# Altium PCB SlowDanceTop.PcbDoc
Units mm, origin at the board's own origin, x right, y up, seen from the top; angles counter-clockwise.
Board outline 56.05 x 45.55 mm, 2 copper layers (Top Layer, Bottom Layer); 63 components, 47 nets, 223 pads, 72 vias.
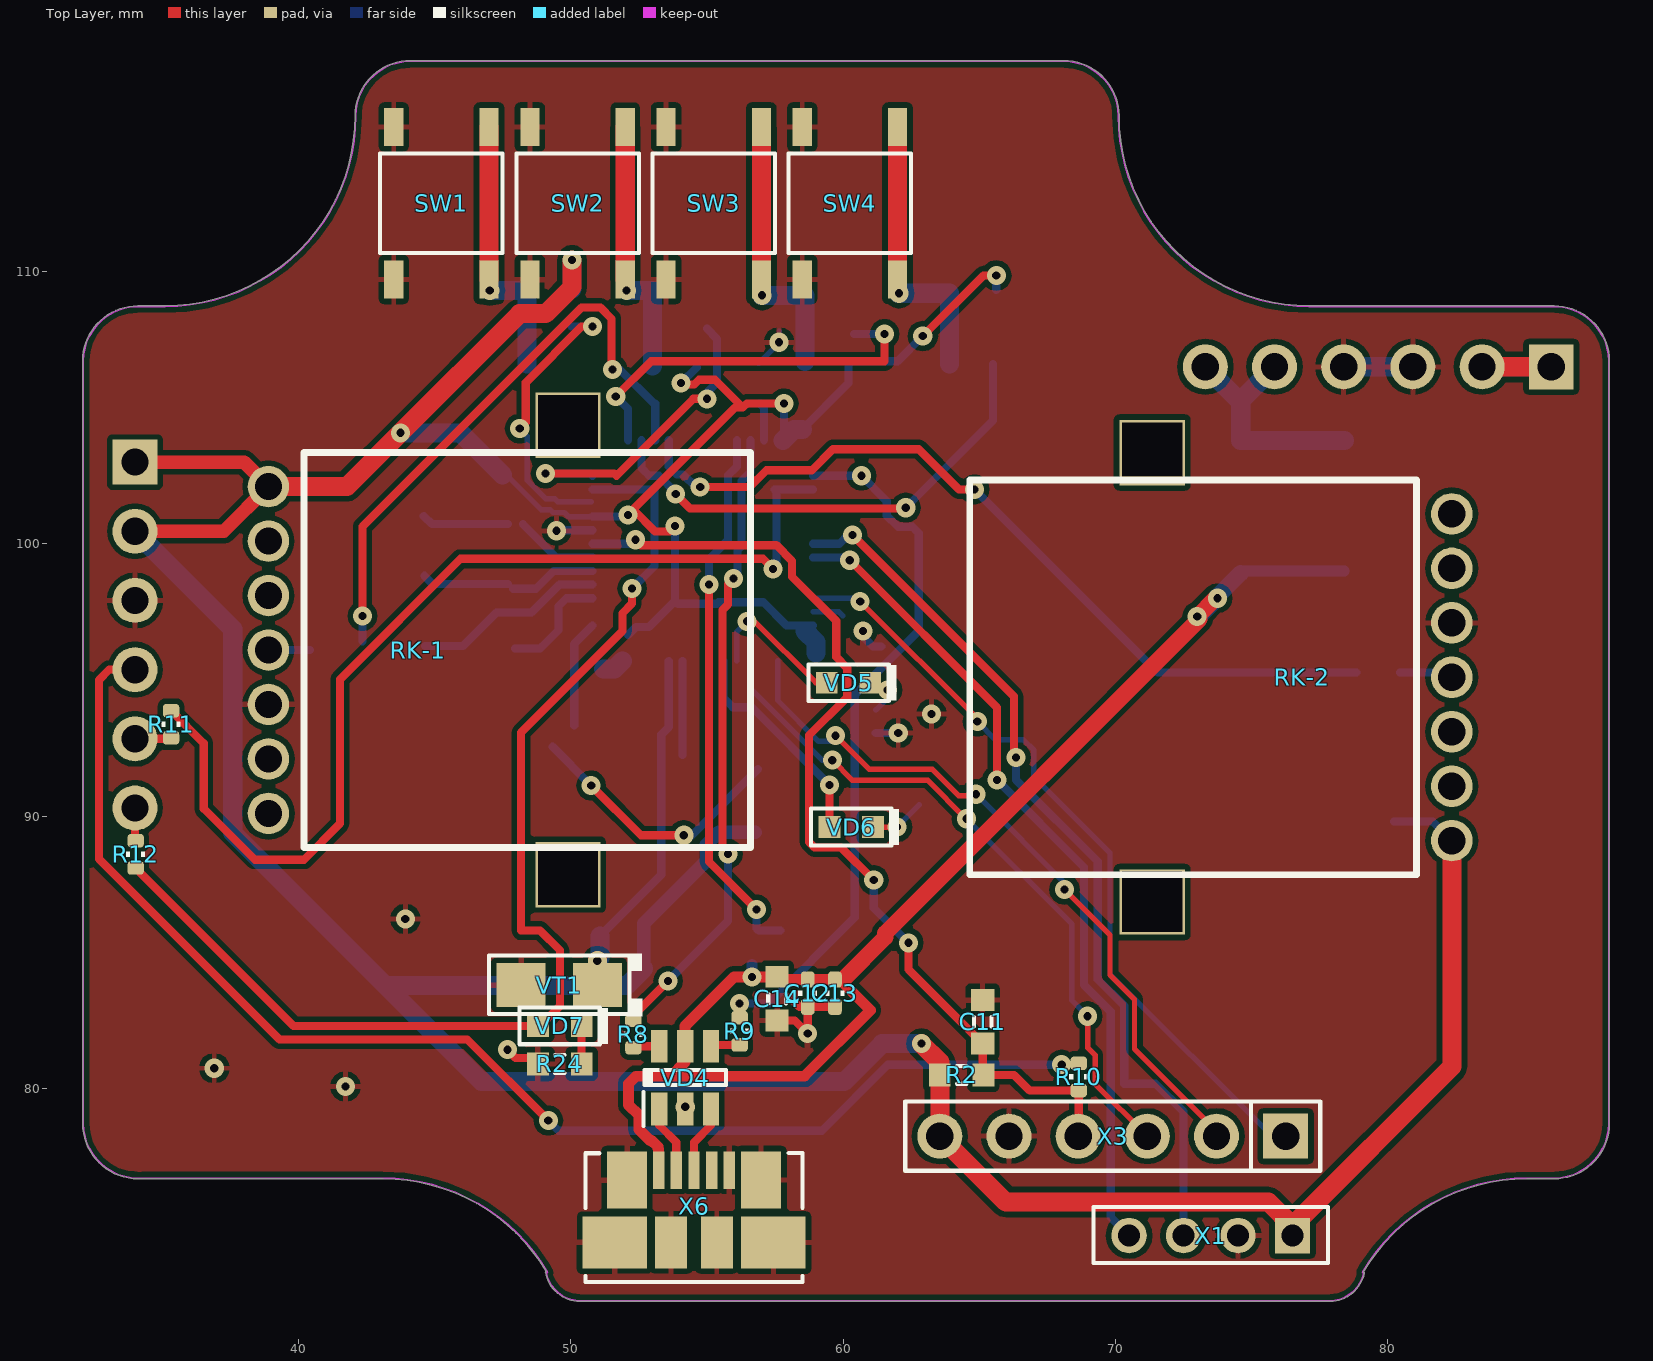
[diagram p0: Top Layer view]
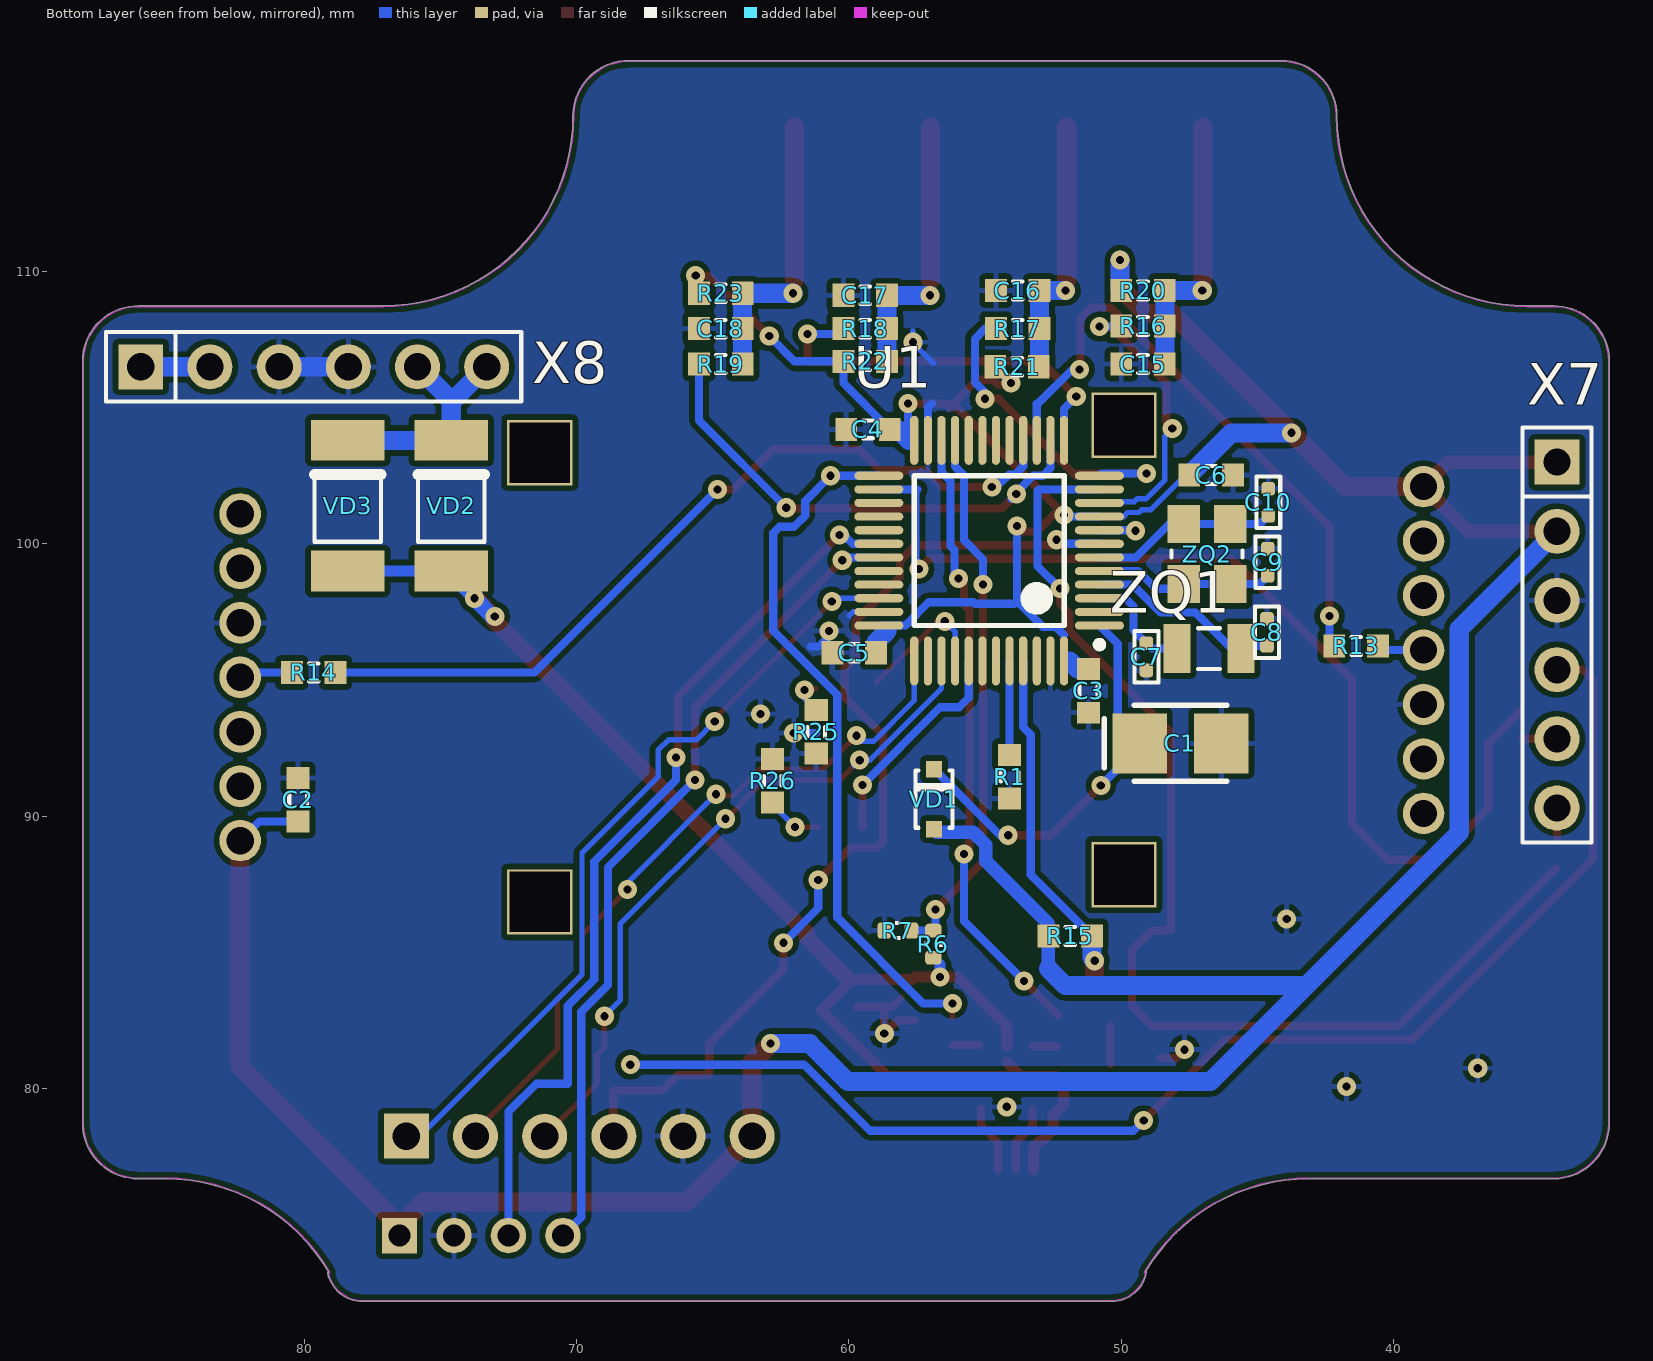
[diagram p1: Bottom Layer view, seen from below]
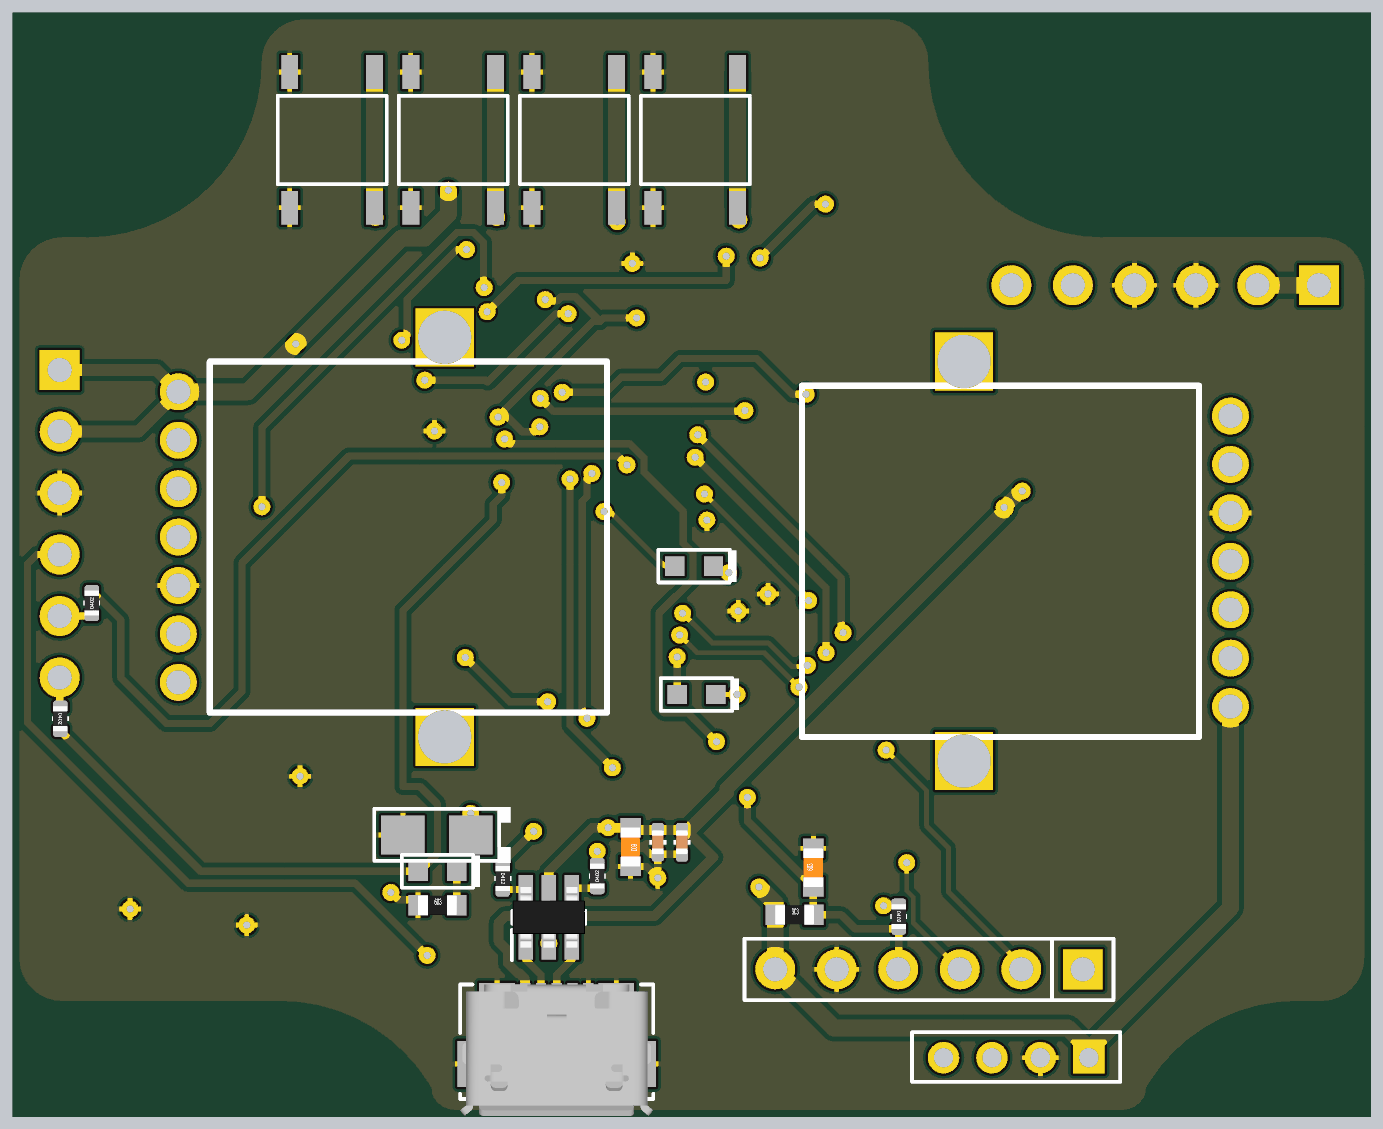
[diagram p2: 3D render of the assembled board from above, using the file's embedded part models]
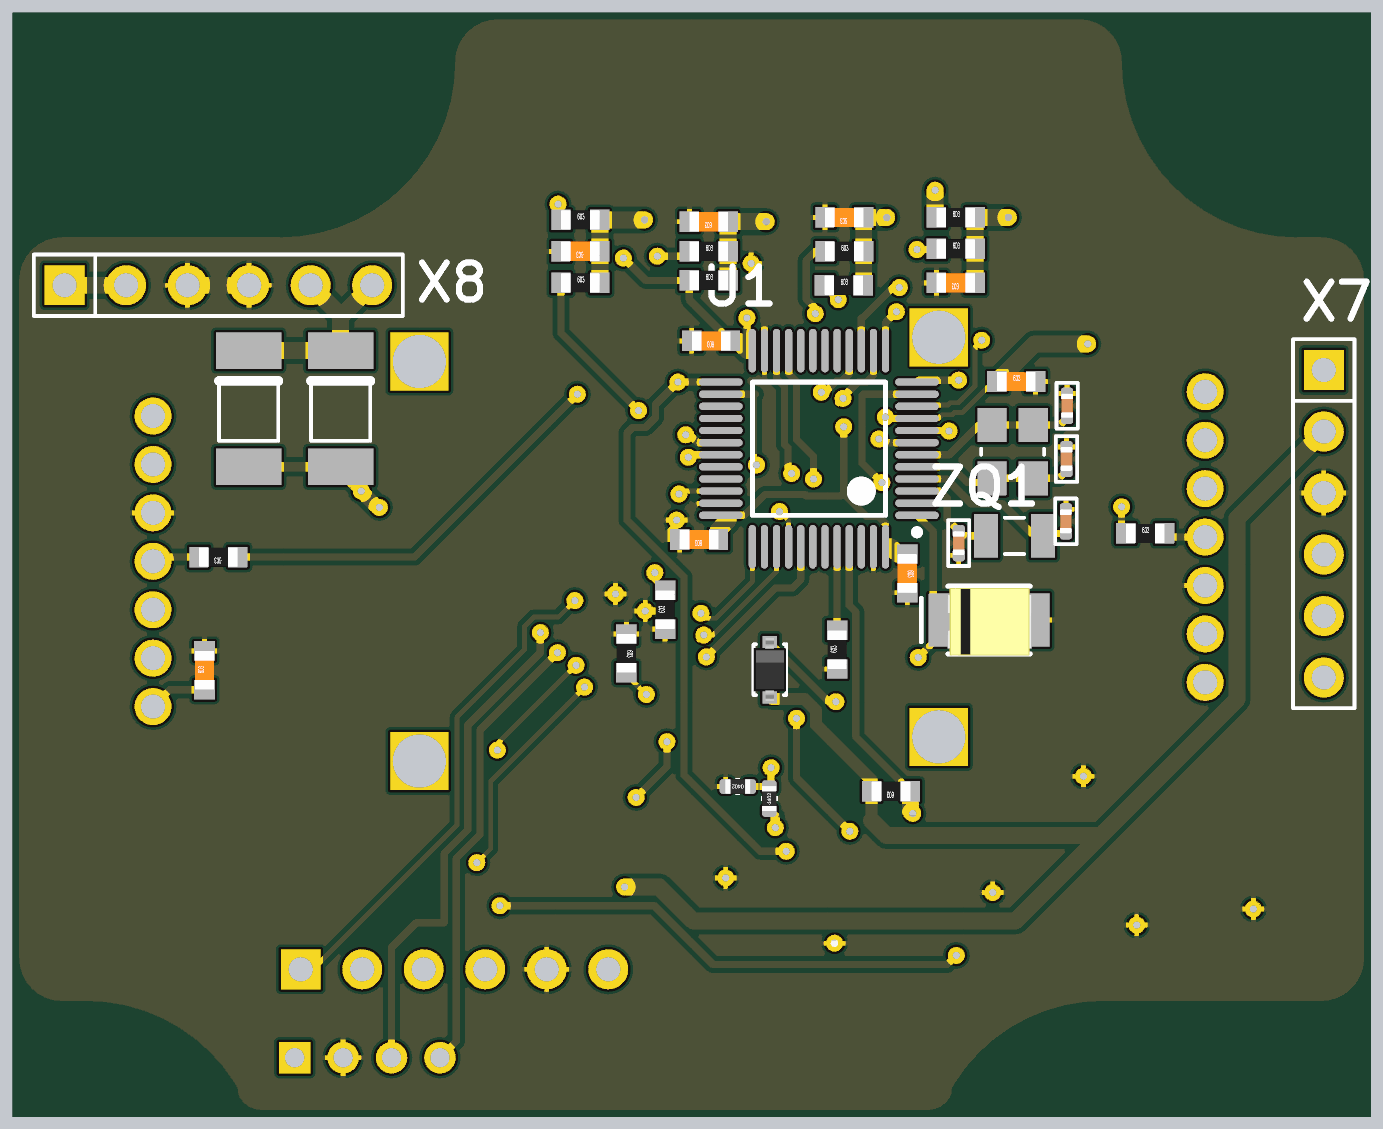
[diagram p3: 3D render of the assembled board from below, using the file's embedded part models]

## Layer stack, top to bottom
Top Solder: solder mask 0.0102, Solder Resist, Dk 3.5
Top Layer: signal copper 0.0356
Dielectric 1: dielectric 0.32, FR-4, Dk 4.8
Bottom Layer: signal copper 0.0356
Bottom Solder: solder mask 0.0102, Solder Resist, Dk 3.5

## Board outline
49.073,73.251 cw(c49.098,73.255) 49.099,73.28 ccw(c43.106,69.712) 43.106,76.687 34.106,76.687 cw(c34.106,76.712) 34.106,76.687 ccw(c34.106,78.712) 34.106,76.687 cw(c34.106,78.712) 32.081,78.712 32.081,106.712 cw(c34.106,106.712) 34.106,108.737 35.106,108.737 ccw(c35.106,115.712) 42.081,115.712 cw(c44.106,115.712) 44.106,117.737 68.106,117.737 cw(c68.106,115.712) 70.131,115.712 ccw(c77.106,115.712) 77.106,108.737 cw(c77.106,108.712) 77.106,108.737 86.106,108.737 cw(c86.106,106.712) 88.131,106.712 88.131,78.712 cw(c86.106,78.712) 86.106,76.687 85.106,76.687 ccw(c85.106,69.712) 79.099,73.256 cw(c79.11,73.233) 79.136,73.233 cw(c79.11,73.233) 79.135,73.228 cw(c77.872,73.474) 77.877,72.187 cw(c77.872,72.212) 77.872,72.187 50.34,72.187 cw(c50.34,72.212) 50.338,72.187 cw(c50.34,73.474)

## Design rules (kind name [scope] priority, off if disabled: settings)
Clearance [All] p1: gap=0.2 ignorepadtopadclearanceinfootprint=FALSE except(0: Arc-Hole Track-Hole SMDPad-Hole THPad-Hole Via-Hole Fill-Hole Poly-Hole Region-Hole Text-Hole)
DiffPairsRouting [All] p1: maxlimit=0.254 minlimit=0.1 mostfreqgap=0.2 toplayer_minwidth=0.1 toplayer_maxwidth=0.381 toplayer_prefwidth=0.3 bottomlayer_minwidth=0.1 bottomlayer_maxwidth=0.381 bottomlayer_prefwidth=0.3 maxuncoupledlength=12.7
MatchedLengths [InxSignalClass('All xSignals')] p1: tolerance=1 checknetsindiffpair=TRUE checkdiffpairvsdiffpair=FALSE checkxsignals=FALSE checkothers=FALSE
PlaneClearance [All] p1: clearance=0.5
PlaneConnect [All] p1: planeconnectstyle=Relief reliefexpansion=0.5 reliefentries=4 reliefconductorwidth=0.2 reliefairgap=0.2
PolygonConnect [All] p1: connectstyle=Relief reliefconductorwidth=0.2 reliefentries=4 polygonreliefangle="90 Angle" airgapwidth=0.2
RoutingVias [All] p1: holewidth=0.3 width=0.7 viastyle="Through Hole" minholewidth=0.3 minwidth=0.7 maxholewidth=0.3 maxwidth=0.7
SolderMaskExpansion [All] p1: expansion=0.102
Width 3V3 [All] p1: maxlimit=0.7 minlimit=0.2 preferedwidth=0.3
Width 5V [InNet('5V')] p2: maxlimit=2 minlimit=0.2 preferedwidth=0.6
Width [All] p3: maxlimit=1 minlimit=0.2 preferedwidth=0.3
27 further rules are at their usual default settings.

## Components (designator, comment, footprint, x,y, rotation, side; value= is the part's Value field where it differs from the comment)
C1 "Tann B 100 мкФ 6 В" CAP_POL_SIZE_B 47.825,92.675 r180 bottom value="100 мкФ"
C2 "C0603-X7R-50В-0.1мкФ" C0603_HD 80.225,90.6 r90 bottom value="0.1 мкФ"
C3 "C0603-X7R-50В-0.1мкФ" C0603_HD 51.2,94.6 r270 bottom value="0.1 мкФ"
C4 "C0603-X7R-50В-0.1мкФ" C0603_HD 59.3,104.2 r0 bottom value="0.1 мкФ"
C5 "C0603-X7R-50В-0.1мкФ" C0603_HD 59.8,96 r0 bottom value="0.1 мкФ"
C6 "C0603-X7R-50В-0.1мкФ" C0603_HD 46.7,102.525 r180 bottom value="0.1 мкФ"
C7 "C0402-X7R-16В-20pF-10%" C0402_HD 49.075,95.85 r90 bottom value=20пФ
C8 "C0402-X7R-16В-20pF-10%" C0402_HD 44.65,96.75 r270 bottom value=20пФ
C9 "C0402-X7R-16В-20pF-10%" C0402_HD 44.625,99.325 r270 bottom value=20пФ
C10 "C0402-X7R-16В-20pF-10%" C0402_HD 44.6,101.525 r270 bottom value=20пФ
C11 "C0603-X5R-16В-22нФ" C0603_HD 65.125,82.45 r90 top value=22нФ
C12 "C0402-X7R-10В-47нФ" C0402_min 58.7,83.5 r270 top value="47 нФ"
C13 "C0402-X7R-16В-0.1мкФ" C0402_min 59.7,83.5 r90 top value="0.1 мкФ"
C14 "C0603-X5R-6.3В-4.7мкФ±20%" C0603_HD 57.575,83.3 r270 top value="4.7 мкФ"
C15 "C0603-X5R-16В-22нФ" C0603_HD 49.2,106.6 r0 bottom value=22нФ
C16 "C0603-X5R-16В-22нФ" C0603_HD 53.8,109.3 r0 bottom value=22нФ
C17 "C0603-X5R-16В-22нФ" C0603_HD 59.4,109.125 r0 bottom value=22нФ
C18 "C0603-X5R-16В-22нФ" C0603_HD 64.7,107.9 r0 bottom value=22нФ
R1 "R0603-10кОм-5%" R0603_HD 54.1,91.45 r90 bottom value="10 кОм"
R2 "R0603-100кОм-5%" R0603_HD 64.35,80.5 r0 top value="100 кОм"
R6 "R0402-100кОм-5%" R0402_min 56.9,85.3 r90 bottom value="100 кОм"
R7 "R0402-000кОм-5%" R0402_min 58.2,85.8 r0 bottom value="200 кОм"
R8 "R0402-39Ом-5%" R0402_min 52.3,82 r270 top value="39 Ом"
R9 "R0402-39Ом-5%" R0402_min 56.2,82.1 r90 top value="39 Ом"
R10 "R0402-100Ом-5%" R0402_min 68.65,80.425 r270 top value="100 Ом"
R11 "R0402-100Ом-5%" R0402_min 35.325,93.375 r90 top value="100 Ом"
R12 "R0402-100Ом-5%" R0402_min 34.025,88.6 r270 top value="100 Ом"
R13 "R0603-1кОм-5%" R0603_HD 41.375,96.25 r180 bottom value="1 кОм"
R14 "R0603-1кОм-5%" R0603_HD 79.65,95.275 r0 bottom value="1 кОм"
R15 "R0603-100кОм-5%" R0603_HD 51.875,85.6 r0 bottom value=100кОм
R16 "R0603-1кОм-5%" R0603_HD 49.2,108 r180 bottom value="1 кОм"
R17 "R0603-1кОм-5%" R0603_HD 53.8,107.9 r180 bottom value="1 кОм"
R18 "R0603-1кОм-5%" R0603_HD 59.4,107.9 r180 bottom value="1 кОм"
R19 "R0603-1кОм-5%" R0603_HD 64.7,106.6 r180 bottom value="1 кОм"
R20 "R0603-100кОм-5%" R0603_HD 49.2,109.3 r180 bottom value=100кОм
R21 "R0603-100кОм-5%" R0603_HD 53.825,106.5 r180 bottom value=100кОм
R22 "R0603-100кОм-5%" R0603_HD 59.4,106.7 r180 bottom value=100кОм
R23 "R0603-100кОм-5%" R0603_HD 64.7,109.2 r180 bottom value=100кОм
R24 "R0603-100кОм-5%" R0603_HD 49.6,80.9 r0 top value=100кОм
R25 "R0603-100кОм-5%" R0603_HD 61.2,93.1 r90 bottom value=100кОм
R26 "R0603-100кОм-5%" R0603_HD 62.8,91.3 r270 bottom value=100кОм
RK-1 "RK-1412G-A100K" RK-1412G 38.9,96.1 r270 top
RK-2 "RK-1412G-A100K" RK-1412G 82.35,95.1 r90 top
SW1 "SWT-30" SWT-30 45.25,112.5 r270 top
SW2 "SWT-30" SWT-30 50.25,112.5 r270 top
SW3 "SWT-30" SWT-30 55.25,112.5 r270 top
SW4 "SWT-30" SWT-30 60.25,112.5 r270 top
U1 "STM32F103C6T6A" STM-LQFP48_N 54.85,99.75 r0 bottom
VD1 "BAS16HT1" "SOD323 (SC-76)" 56.875,90.625 r90 bottom
VD2 "SM4007" DO-213AB_ 74.6,101.4 r270 bottom
VD3 "SM4007" DO-213AB_ 78.4,101.4 r270 bottom
VD4 "USBLC6-2SC6" "SOT23-6L (ST)" 54.2,80.4 r0 top
VD5 "KP1608ZGC" LED_0603 60.2,94.9 r0 top
VD6 "KP1608ZGC" LED_0603 60.3,89.6 r0 top
VD7 "KP1608ZGC" LED_0603 49.6,82.3 r0 top
VT1 "KP-3216P3C" photocell_1206 50.975,83.8 r180 top
X1 "n/m PLS-4" PLS2-4 76.5,74.6 r90 top
X3 "n/m PLS-6" PLS-06 76.25,78.25 r180 top
X6 "Molex 47346-1001" "MicroUSB 047346-0001 Molex" 54.525,75.675 r90 top
X7 "n/m PLS-6" PLS-06 34,103 r270 bottom
X8 "n/m PLS-6" PLS-06 86,106.5 r180 bottom
ZQ1 "DST310S 32.768 kHz, 20ppm, 50 kOhm, 7pF (1TJF0SPDJ1AI00D)" DST310S 46.775,96.15 r180 bottom value="32.768 кГц"
ZQ2 "DSX321G 12 MHz, 10ppm@25C, 20ppm@-40+85C, 80 Ohm, 12pF (1C212000AB0AB)" DSX321G 46.85,99.625 r270 bottom value="12 МГц"

## Footprints (in the part's own frame and the unit in brackets; to place one, negate y for a bottom-side part, rotate by r counter-clockwise, add the part's x,y. Pads: shape width x height; smd on the part's side, far side on the other; paste and mask are expansions set on the pad)
C0402_HD [mm]
  rrect50% 0.5x0.5 smd: 1(0.5,0) 2(-0.5,0)
  silkscreen extent -0.94,-0.44 0.94,0.44, body extent -0.5,-0.25 0.5,0.25, height 0.48
C0402_min [mm]
  rrect50% 0.6x0.5 smd: 1(-0.5,0) 2(0.5,0)
  silkscreen extent -0.1,-0.35 0.1,0.35, body extent -0.5,-0.25 0.5,0.25, height 0.48
C0603_HD [mm]
  rect 0.8x0.85 smd: 1(-0.8,0) 2(0.8,0)
  silkscreen extent -0.18,-0.33 0.18,0.33, body extent -0.8,-0.4 0.8,0.4, height 0.3
CAP_POL_SIZE_B [mm]
  rect 2x2.2 smd: 1(-1.5,0) 2(1.5,0)
  silkscreen extent -2.8,-1.4 1.7,1.4, body extent -1.72,-1.48 1.77,1.32, height 1.91
DO-213AB_ [mm]
  rect 1.5x2.7 smd: 1(2.4,0) 2(-2.4,0)
  silkscreen extent -1.15,-1.22 1.32,1.23, body extent -2.52,-1.25 2.48,1.25, height 2.5
DST310S [mm]
  rect 1x1.8 smd: 1(-1.175,0) 2(1.175,0)
  silkscreen extent -0.4,-0.75 0.4,0.75, body extent -1.6,-0.75 1.6,0.75, height 0.85
DSX321G [mm]
  rect 1.4x1.2 smd: 1(-1.1,-0.85) 2(1.1,-0.85) 3(1.1,0.85) 4(-1.1,0.85)
  silkscreen extent -0.13,-1.3 0.13,1.3, body extent -1.6,-1.3 1.6,1.3, height 1
LED_0603 [mm]
  rect 0.8x0.8 smd: 1(-0.8,0) 2(0.8,0)
  silkscreen extent -1.47,-0.67 1.75,0.67, body extent -0.8,-0.4 0.8,0.4, height 1.1
"MicroUSB 047346-0001 Molex" [mm]
  rect 1.38x0.42 smd mask+0.1: 1(1.33,1.3) 2(1.33,0.65) 3(1.33,0) 4(1.33,-0.65) 5(1.33,-1.3)
  rect 1.9x2.375 smd mask+0.1: 6(-1.33,2.912) 6(-1.33,-2.912)
  rect 1.9x1.175 smd mask+0.1: 6(-1.329,-0.836) 6(-1.329,0.836)
  rect 2.1x1.475 smd mask+0.1: 6(0.97,2.462) 6(0.97,-2.462)
  silkscreen extent -2.78,-3.99 1.95,3.99, body extent -3.48,-3.99 1.95,3.99, height 2.67
photocell_1206 [mm]
  rect 1.8x1.6 smd: 1(2.8,0) 2(0,0)
  Top Layer pour cut-out: 0.9,1 1.9,1 1.9,-0.925 0.9,-0.925
  silkscreen extent -1.65,-1.16 3.98,1.15, body extent -0.2,-0.8 3,0.8, height 1.1
PLS2-4 [mm]
  rect 1.3x1.3 hole 0.8: 1(0,0)
  round 1.3 hole 0.8: 2(0,2) 3(0,4) 4(0,6)
  silkscreen extent -1,-1.3 1.05,7.3
PLS-06 [mm]
  rect 1.65x1.65 hole 1: 1(0,0)
  round 1.65 hole 1: 2(2.54,0) 3(5.08,0) 4(7.62,0) 5(10.16,0) 6(12.7,0)
  silkscreen extent -1.27,-1.27 13.97,1.27
R0402_min [mm]
  rrect50% 0.5x0.6 smd: 1(-0.5,0) 2(0.5,0)
  silkscreen extent -0.1,-0.35 0.1,0.35, body extent -0.52,-0.3 0.52,0.3, height 0.34
R0603_HD [mm]
  rect 0.8x0.85 smd: 1(-0.8,0) 2(0.8,0)
  silkscreen extent -0.18,-0.33 0.18,0.33, body extent -0.8,-0.4 0.8,0.4, height 0.3
RK-1412G [mm]
  round 1.524 hole 1: 1(-4,0) 1'(-6,0) 2(-2,0) 2'(0,0) 3(4,0) 3'(2,0) 4(6,0)
  rect 2.4x2.4 hole 2.2 square: ""(-8.25,11) ""(8.25,11)
  silkscreen extent -7.25,1.3 7.25,17.7
"SOD323 (SC-76)" [mm]
  rect 0.6x0.6 smd: 1(-1.1,0) 2(1.1,0)
  silkscreen extent -1.05,-0.75 1.05,0.67, body extent -1.3,-0.67 1.3,0.68, height 1.1
"SOT23-6L (ST)" [mm]
  rect 0.6x1.2 smd: 1(-0.95,-1.15) 2(0,-1.15) 3(0.95,-1.15) 4(0.95,1.15) 5(0,1.15) 6(-0.95,1.15)
  silkscreen extent -1.53,-1.78 1.5,0.28, body extent -1.5,-1.25 1.5,1.25, height 1.05
STM-LQFP48_N [mm] "QFP, 48-Leads, Body 7x7mm, Pitch 0.5mm, IPC Medium Density"
  oval 1.8x0.3 smd: 1(-4.05,2.75) 2(-4.05,2.25) 3(-4.05,1.75) 4(-4.05,1.25) 5(-4.05,0.75) 6(-4.05,0.25) 7(-4.05,-0.25) 8(-4.05,-0.75) 9(-4.05,-1.25) 10(-4.05,-1.75) 11(-4.05,-2.25) 12(-4.05,-2.75) 25(4.05,-2.75) 26(4.05,-2.25) 27(4.05,-1.75) 28(4.05,-1.25) 29(4.05,-0.75) 30(4.05,-0.25) 31(4.05,0.25) 32(4.05,0.75) 33(4.05,1.25) 34(4.05,1.75) 35(4.05,2.25) 36(4.05,2.75)
  oval 0.3x1.8 smd: 13(-2.75,-4.05) 14(-2.25,-4.05) 15(-1.75,-4.05) 16(-1.25,-4.05) 17(-0.75,-4.05) 18(-0.25,-4.05) 19(0.25,-4.05) 20(0.75,-4.05) 21(1.25,-4.05) 22(1.75,-4.05) 23(2.25,-4.05) 24(2.75,-4.05) 37(2.75,4.05) 38(2.25,4.05) 39(1.75,4.05) 40(1.25,4.05) 41(0.75,4.05) 42(0.25,4.05) 43(-0.25,4.05) 44(-0.75,4.05) 45(-1.25,4.05) 46(-1.75,4.05) 47(-2.25,4.05) 48(-2.75,4.05)
  silkscreen extent -4.17,-2.75 2.75,3.57, body extent -3.5,-3.5 3.5,3.5, height 1.6
SWT-30 [mm]
  rect 1.4x0.7 smd: 1(-2.8,-1.75) 1(2.8,-1.75) 2(-2.8,1.75) 2(2.8,1.75)
  silkscreen extent -1.83,-2.25 1.83,2.25, body extent -1.83,-2.25 1.83,2.25, height 1.5

## Part data
C1: library part CAP_TANT_B
C2 C3 C4 C5 C6 C12 C13: library part C0603
C7 C8 C9 C10: library part C0402
C11 C14 C15 C16 C17 C18: library part C0603_HD
R1 R2 R13 R14 R15 R16 R17 R18 R19 R20 R21 R22 R23 R24 R25 R26: library part R0603
R6 R7 R8 R9 R10 R11 R12: library part R0402
RK-1 RK-2: library part RK-1412G, Operation voltage (AC only)=50В, Rated power="50 мВт", Resistance="0-100 кОм", Total rot.angle=300
U1: "ARM Cortex-M3 32-bit MCU, 32 KB Flash, 10 KB Internal RAM, 37 I/Os, 48-pin LQFP, -40 to 85 degC, Tray", I/Os (High Current)=37, Operating Frequency(F) (Processor speed) (MHz)=72, Supplier Part Number 1=497-11515-ND, Supply Voltage(Vcc) min (V)=2, A/D Converter="2x12-bit (10 Channel)", ComponentLink1Description="Manufacturer URL", ComponentLink1URL=http://www.st.com/web/en/home.html, ComponentLink2Description=Datasheet, ComponentLink2URL=http://www.st.com/st-web-ui/static/active/en/resource/technical/document/datasheet/CD00210843.pdf, ComponentLink3Description="Package Specification", ComponentLink3URL=http://www.st.com/st-web-ui/static/active/en/resource/technical/document/datasheet/DM00058181.pdf, Core="ARM Cortex-M3", DatasheetVersion="Rev. 6", FLASH Size (Prog) (kB)=32, Internal RAM Size (kB)=10, Mounting Technology="Surface Mount", PackageDescription="48-Pin Low Profile Quad Flat Package, 7 x 7 mm Body, 0.5 mm Pitch", PackageReference=LQFP48, PackageVersion="Rev. 6, 06/2013", Packing=Tray, PartNumber=STM32F103C6T6A, Supplier 1=Digi-Key, Supplier 2=Farnell, Supplier 3=Newark, Supplier 4=Newark, Supplier 5=Mouser, Supplier Part Number 2=1972391, Supplier Part Number 3=72T2643, Supplier Part Number 4=57P1219, Supplier Part Number 5=511-STM32F103C6T6A
VD1: library part BAS16H
VD2 VD3: library part SM400x
VD5 VD6 VD7: library part LED_0603
X1: library part PLS2-4
X3 X7 X8: library part PLS-6
X6: library part "MicroUSB 047346-0001 Molex"
ZQ2: library part DSX321G

## Via types
v1: diameter 0.7, hole 0.3, Top Layer to Bottom Layer, 72 vias

## Nets (pads, with @x,y where several pads share a name; then routed paths per layer and width w, separated by ;. In a path a pad name is that pad's centre, name@x,y a point inside that pad or via, vN(x,y) a via of type N, cw(c..) or ccw(c..) an arc to the next point about the centre after c; other vN are vias at no path point)
3V3: C2.1 C3.1 C4.1 C5.1 C6.1 R2.1 R15.2 R20.1 R21.1 R22.1 R23.1 RK-1.1' RK-2.1' U1.9 U1.24 U1.36 U1.48 VD1.1 X1.1 X3.6 X7.1 X7.2 | length 171.2
  Top Layer w0.3: v1(52.103,101.055) 52.298,101.25 53.098,100.45 53.623,100.45 v1(53.828,100.655) ; v1@52.103,101.07 56.033,105 56.315,105 ; v1(54.053,105.905) 54.108,105.85 54.535,105.85 54.71,106.025 55.29,106.025 56.315,105 ; v1(57.825,105.15) 56.465,105.15 56.315,105 ; v1(62.925,107.625) 65.15,109.85 v1(65.625,109.85)
  Top Layer w0.5: X7.2 37.26,100.46 RK-1.1' 38,103 X7.1
  Top Layer w0.7: RK-1.1' 41.775,102.1 v1(43.75,104.075) 48.125,108.45 49.078,108.45 50.05,109.422 v1(50.05,110.425) ; v1(62.875,81.65) 63.55,80.975 R2.1 X3.6 65.975,75.825 75.625,75.825 76.5,74.95 82.35,80.8 RK-2.1'
  Bottom Layer w0.2: C6.1@47.647,102.525 48.922,101.25 49.25,101.25 49.35,101.15 49.764,101.15 49.914,101 U1.9
  Bottom Layer w0.3: U1.9 52.048,101 v1(52.103,101.055) ; 52.1,96.657 52.393,96.95 52.875,96.95 53.828,97.903 ; v1(53.828,100.655) 53.828,97.903 ; v1(54.053,105.905) R21.1@54.625,106.478 ; U1.24@57.675,103.875 57.825,104.025 v1(57.825,105.15) ; C4.1 60.2,105.9 R22.1 62,106.7 v1(62.925,107.625) ; U1.36 57.925,97 57.07,97.855 55.42,97.855 55.365,97.8 53.93,97.8 53.828,97.903 ; R23.1@65.625,109.325 v1(65.625,109.85) ; C2.1 81.65,89.8 RK-2.1'
  Bottom Layer w0.5: 52.675,84.4 R15.2 52.675,86.05 54.975,88.35 54.975,88.946 55.444,89.415 VD1.1@56.765,89.415
  Bottom Layer w0.7: X7.2 37.588,96.872 37.588,89.395 43.208,83.775 ; v1(43.75,104.075) 45.953,104.075 C6.1@47.5,102.528 ; R20.1@50.05,109.35 v1(50.05,110.425) ; C3.1 51.6,95.4 51.9,95.7 ; 52.675,84.4 52.05,83.775 43.208,83.775 ; 57.8,103.8 58.2,104.2 C4.1 ; 58.6,96.8 59,96.4 C5.1 ; v1(62.875,81.65) 61.435,81.65 60.035,80.25 46.733,80.25 43.208,83.775
5V: VD2.2 VD3.2 X8.5 X8.6 | length 8.9
  Bottom Layer w0.7: X8.6 74.6,105.2 ; X8.5 74.6,105.26 74.6,105.2 ; VD3.2 VD2.2 74.6,105.2
+12В: X8.1 X8.2 | length 5.1
  Top Layer w0.7: X8.2 X8.1
  Bottom Layer w0.7: X8.2 X8.1
GND: C1.2 C2.2 C3.2 C4.2 C5.2 C6.2 C7.2 C8.2 C9.2 C10.2 C11.2 C12.2 C13.1 C14.2 C15.2 C16.2 C17.2 C18.2 R1.1 R7.2 R24.1 R25.1 R26.1 RK-1.3' RK-2.3' SW1.1 SW2.1 SW3.1 SW4.1 U1.8 U1.23 U1.35 U1.47 VD4.2 VT1.1 X1.2 X3.5 X6.5 X6.6 X7.3 X8.3 X8.4 | length 15.1
  Top Layer w0.3: v1(47.675,81.425) 47.975,81.125 R24.1@48.575,81.125 ; VD4.2 54.2,79.332 v1(54.203,79.329) VD4.2@54.203,79.522 ; C14.2 58.225,82.5 v1(58.7,82.025) C12.2 ; 58.1,83.3 58.4,83 C12.2 ; C13.1 C12.2
  Bottom Layer w0.2: 56.9,106.625 57.65,107.375 v1(57.65,107.4) 57.65,107.8 ; U1.35 59.843,97.5 59.98,97.363
  Bottom Layer w0.3: v1(49.477,100.48) 49.498,100.5 U1.8 ; 56.95,105.15 57.1,105 U1.23 ; v1(60.725,96.8) 60.725,96.6 61.1,96.225 61.4,96.225 ; 61.2,93.05 v1(62.025,93.05)
  Bottom Layer w0.7: X8.4 X8.3
  other v1: 41.725,80.075 36.91,80.743 43.925,86.225 63.25,93.75
NetC1_1: C1.1 U1.1 VD1.2 | length 13.9
  Top Layer w0.3: v1(50.75,91.125) 52.575,89.3 v1(54.15,89.3)
  Bottom Layer w0.3: C1.1@49.325,92.55 v1(50.75,91.125) ; C1.1@50.125,93.325 50.125,96.325 U1.1 ; v1(54.15,89.3) 54.45,89.3 VD1.2
NetC7_1: C7.1 U1.3 ZQ1.1 | length 4.1
  Bottom Layer w0.3: ZQ1.1 48.875,96.15 C7.1 49.55,96.825 49.55,97.707 49.843,98 U1.3
NetC8_1: C8.1 U1.4 ZQ1.2 | length 7.1
  Bottom Layer w0.3: C8.1 46.05,96.25 47.275,97.475 48.557,97.475 49.582,98.5 U1.4
NetC9_1: C9.1 U1.5 ZQ2.2 ZQ2.3 | length 6.4
  Bottom Layer w0.3: C9.1 44.925,98.525 ZQ2.3 ZQ2.2 ; ZQ2.2@47.875,98.35 48.725,98.35 49.375,99 U1.5
NetC10_1: C10.1 U1.6 ZQ2.1 ZQ2.4 | length 6.3
  Bottom Layer w0.3: C10.1 44.9,100.725 ZQ2.4 ZQ2.1 ; ZQ2.1@48.25,100.725 48.25,100.717 49.467,99.5 U1.6
NetC11_1: C11.1 R2.2 R10.2 U1.7 X3.4 | length 36.6
  Top Layer w0.3: v1(52.375,100.15) 52.575,99.95 57.548,99.95 58.128,99.37 58.128,98.79 59.75,97.168 59.75,95.845 60.15,95.445 60.15,94.355 59.449,93.654 59.435,93.654 58.75,92.969 58.75,89.055 58.955,88.85 59.925,88.85 v1(61.125,87.65) ; v1(62.4,85.35) 62.4,84.375 C11.1 R2.2@65.125,80.525 ; R2.2 66.275,80.5 66.85,79.925 R10.2 X3.4@68.65,78.27
  Bottom Layer w0.3: U1.7 52.225,100 v1(52.375,100.15) ; v1(61.125,87.65) 61.125,86.625 v1(62.4,85.35)
NetC12_1: C12.1 C13.2 C14.1 R6.1 VD2.1 VD3.1 VD4.5 X6.1 | length 49.5
  Top Layer w0.4: X6.1 53.225,77.775 53.2,77.8 53.2,77.861 52.966,78.095 52.905,78.095 52.5,78.5 52.5,79.025 52.125,79.4 52.125,80.175 52.4,80.45 53.675,80.45 ; VD4.5@54.2,80.975 53.675,80.45 ; VD4.5 54.2,82.3 56,84.1 v1(56.65,84.1) C14.1 57.675,84 C13.2 60,84 ; C13.2@59.875,84 61,82.875 58.575,80.45 53.675,80.45
  Top Layer w0.6: 60,84 61.55,85.55 61.55,85.702 v1@73.086,97.239 ; v1(73,97.325) 73.675,98 v1(73.75,98)
  Bottom Layer w0.4: v1(56.65,84.1) 56.65,84.55 ; VD2.1@74.6,98.925 VD2.1 VD3.1
  Bottom Layer w0.6: v1@73.075,97.325 v1(73.75,98) ; v1@73.712,98.038 VD2.1@74.6,98.925
NetC15_1: C15.1 R16.2 R20.2 SW1.2 | length 9.7
  Top Layer w0.7: SW1.2@47,109.7 SW1.2@47,115.3
  Bottom Layer w0.7: v1(47.025,109.3) R20.2 R16.2 C15.1
NetC16_1: C16.1 R17.2 R21.2 SW2.2 | length 9.3
  Top Layer w0.7: SW2.2@52,109.7 SW2.2@52,115.3
  Bottom Layer w0.7: v1(52.05,109.3) C16.1 R21.2@53,106.525
NetC17_1: C17.1 R18.2 R22.2 SW3.2 | length 9.6
  Top Layer w0.7: SW3.2@57,109.7 SW3.2@57,115.3
  Bottom Layer w0.7: v1(57.025,109.125) C17.1 R22.2
NetC18_1: C18.1 R19.2 R23.2 SW4.2 | length 10.1
  Top Layer w0.7: SW4.2@62,109.7 SW4.2@62,115.3
  Bottom Layer w0.7: v1(62.05,109.2) R23.2 R19.2
NetR1_2: R1.2 U1.44 | length 3.5
  Bottom Layer w0.3: R1.2 U1.44
NetR6_2: R6.2 R7.1 U1.21 | length 20
  Top Layer w0.3: v1(55.075,98.5) 55.075,88.325 v1(56.825,86.575)
  Bottom Layer w0.3: v1(55.075,98.5) 55.075,99.432 55.775,100.132 55.775,102.518 56.1,102.843 U1.21 ; v1(56.825,86.575) 56.825,85.875 R6.2 R7.1
NetR8_1: R8.1 U1.22 | length 23.2
  Top Layer w0.3: R8.1@52.3,82.675 v1(53.575,83.95) ; v1@55.716,88.556 v1(55.775,88.615) 55.575,88.815 55.575,97.577 55.775,97.777 55.775,98.527 v1(55.978,98.73)
  Bottom Layer w0.3: v1(53.575,83.95) 55.775,86.15 v1(55.775,88.615) ; v1(55.978,98.73) 56.125,98.877 56.125,99.775 56.275,99.925 56.275,102.311 56.6,102.636 U1.22
NetR8_2: R8.2 VD4.6 | length 0.9
  Top Layer w0.3: R8.2@52.35,81.55 VD4.6
NetR9_1: R9.1 VD4.4 | length 1
  Top Layer w0.3: VD4.4@55.2,81.6 R9.1
NetR9_2: R9.2 U1.25 | length 26.2
  Top Layer w0.2: R9.2 v1(56.2,83.125)
  Bottom Layer w0.3: v1(56.2,83.125) 57.275,83.125 60.425,86.275 60.425,94.445 62.775,96.795 62.775,100.4 62.55,100.625 62.01,100.625 61.6,101.035 61.6,101.575 v1(60.675,102.5) U1.25
NetR10_1: R10.1 X7.4 | length 48.6
  Top Layer w0.3: X7.4 33.055,95.38 32.675,95 32.675,88.425 39.3,81.8 46.2,81.8 v1(49.175,78.825) ; v1(68.025,80.875) v1@68.075,80.925
  Bottom Layer w0.3: v1(49.175,78.825) 49.55,78.45 59.225,78.45 61.65,80.875 v1(68.025,80.875)
NetR11_1: R11.1 X7.5 | length 1.3
  Top Layer w0.3: X7.5 R11.1@35.29,92.84
NetR11_2: R11.2 U1.26 | length 38.1
  Top Layer w0.3: R11.2 36.525,92.675 36.525,90.275 38.4,88.4 40.2,88.4 41.525,89.725 41.525,95.025 45.95,99.45 52.085,99.45 52.665,99.45 57.058,99.45 v1(57.428,99.08)
  Bottom Layer w0.3: v1@57.428,99.028 v1(57.428,99.08) 57.55,99.202 57.55,101.925 57.475,102 U1.26
NetR12_1: R12.1 X7.6 | length 1.2
  Top Layer w0.3: R12.1@34,89.125 X7.6
NetR12_2: R12.2 U1.11 VD7.1 | length 42.5
  Top Layer w0.3: R12.2 39.825,82.3 VD7.1 48.87,82.3 49.6,83.03 49.6,85.075 48.875,85.8 48.175,85.8 48.175,93.075 51.9,96.8 51.9,97.45 52.253,97.803 v1(52.253,98.355)
  Bottom Layer w0.3: U1.11 53.029,102 53.075,101.954 53.075,99.177 v1(52.253,98.355)
NetR13_1: R13.1 U1.15 | length 22.2
  Top Layer w0.3: v1(42.35,97.35) 42.35,100.632 50.393,108.675 51.09,108.675 51.5,108.265 51.5,106.435 v1(51.53,106.405)
  Bottom Layer w0.3: R13.1@42.35,96.425 v1(42.35,97.35) ; v1(51.53,106.405) 51.8,106.405 53.055,105.15 53.1,105.15 U1.15
NetR13_2: R13.2 RK-1.2' | length 1.5
  Bottom Layer w0.3: RK-1.2' R13.2@40.425,96.1
NetR14_1: R14.1 U1.16 | length 30.5
  Top Layer w0.3: v1(54.753,102.08) 56.565,102.08 57.185,102.7 58.85,102.7 59.625,103.475 62.775,103.475 64.25,102 v1(64.825,102)
  Bottom Layer w0.3: U1.16 53.6,102.843 53.893,102.55 54.125,102.55 54.595,102.08 v1(54.753,102.08) ; v1(64.825,102) 71.55,95.275 R14.1
NetR14_2: R14.2 RK-2.2' | length 1.7
  Bottom Layer w0.3: R14.2 RK-2.2'@82.175,95.275
NetR15_1: R15.1 U1.45 VT1.2 | length 13
  Top Layer w0.7: VT1.2 v1(50.975,84.69)
  Bottom Layer w0.3: R15.1 53.325,87.85 53.325,93 53.6,93.275 U1.45
  Bottom Layer w0.7: v1(50.975,84.69) 51.075,84.79 R15.1
NetR16_1: R16.1 U1.10 | length 10.5
  Top Layer w0.3: v1(48.127,104.23) 48.35,104.453 48.35,105.925 50.4,107.975 v1(50.8,107.975)
  Bottom Layer w0.2: v1(48.127,104.23) 48.4,103.957 48.4,102.338 49.088,101.65 49.416,101.65 49.516,101.55 U1.10@50.75,101.55
  Bottom Layer w0.3: R16.1@50.025,107.975 v1(50.8,107.975)
NetR17_1: R17.1 U1.12 | length 11.8
  Top Layer w0.3: v1(49.077,102.58) 51.595,102.58 51.675,102.5 54.5,105.325 v1(55,105.325)
  Bottom Layer w0.3: v1(49.077,102.58) 50.72,102.58 U1.12 ; v1(55,105.325) 55,105.555 55.375,105.93 55.375,107.525 55,107.9
NetR18_1: R18.1 U1.13 | length 14.3
  Top Layer w0.3: v1(51.653,105.405) 52.947,106.7 61.525,106.7 v1(61.525,107.7)
  Bottom Layer w0.3: v1@51.645,105.405 v1(51.653,105.405) 52.1,104.958 U1.13 ; R18.1@60.4,107.7 v1(61.525,107.7)
NetR19_1: R19.1 U1.14 | length 18.2
  Top Layer w0.3: v1(53.853,101.83) 54.383,101.3 62.275,101.3 v1(62.3,101.325)
  Bottom Layer w0.3: U1.14 52.6,102.782 52.882,102.5 53.236,102.5 53.853,101.883 v1(53.853,101.83) v1@54.033,101.65 ; v1(62.3,101.325) 65.5,104.525 R19.1
NetR24_2: R24.2 VD7.2 | length 1.4
  Top Layer w0.3: R24.2 VD7.2
NetR25_2: R25.2 VD5.2 | length 1.5
  Top Layer w0.2: VD5.2@61.225,94.675 61.583,94.675 v1(61.628,94.63)
  Bottom Layer w0.2: R25.2 61.775,94.475 61.628,94.622 v1(61.628,94.63)
NetR26_2: R26.2 VD6.2 | length 2
  Top Layer w0.2: VD6.2 v1(61.975,89.6)
  Bottom Layer w0.2: v1(61.975,89.6) R26.2@62.8,90.425
NetU1_30: U1.30 X1.3 | length 33
  Top Layer w0.3: v1(60.35,100.325) 66.275,94.4 66.275,92.233 v1(66.353,92.154)
  Bottom Layer w0.3: U1.30 59.857,100 60.182,100.325 v1(60.35,100.325) ; v1(66.353,92.154) 66.353,91.329 69.35,88.332 69.35,84.007 70.325,83.032 70.325,80.175 71.475,80.175 72.5,79.15 X1.3
NetU1_31: U1.31 X1.4 | length 30.4
  Top Layer w0.3: v1(60.243,99.396) 65.65,93.99 v1(65.65,91.325)
  Bottom Layer w0.3: U1.31 60.14,99.5 v1(60.243,99.396) ; v1(65.65,91.325) 68.85,88.125 68.85,83.8 69.825,82.825 69.825,75.275 X1.4
NetU1_34: U1.34 X3.1 | length 28.3
  Top Layer w0.2: v1(60.628,97.88) 64.928,93.58 v1(64.928,93.48)
  Bottom Layer w0.2: U1.34 60.575,98 60.628,97.947 v1(60.628,97.88) ; v1(64.928,93.48) 65.603,92.804 66.622,92.804 67.003,92.424 67.003,91.447 69.8,88.65 69.8,84.193 X3.1@75.743,78.25
NetU1_37: U1.37 X3.2 | length 26.8
  Top Layer w0.2: v1(59.725,92.954) 60.954,91.725 63.266,91.725 64.241,90.75 64.824,90.75 v1(64.878,90.804) ; v1(68.128,87.304) 69.8,85.633 69.8,84.175 70.7,83.275 70.7,81.45 73.71,78.44 X3.2
  Bottom Layer w0.2: U1.37 57.6,94.252 59.102,92.75 59.521,92.75 v1(59.725,92.954) ; v1(64.878,90.804) 68.3,87.383 68.222,87.304 v1(68.128,87.304)
NetU1_39: U1.39 X3.3 | length 25.7
  Top Layer w0.2: v1(59.603,92.054) 60.332,91.325 63.1,91.325 64.521,89.904 v1(64.528,89.904) ; v1(68.978,82.654) 68.978,81.498 69.25,81.226 69.25,80.17 X3.3
  Bottom Layer w0.2: U1.39 56.6,94.686 59.232,92.054 v1(59.603,92.054) v1@59.807,91.85 ; v1(64.528,89.904) 68.4,86.033 68.4,83.232 v1(68.978,82.654) v1@69.046,82.654
NetU1_40: U1.40 VD5.1 | length 5.1
  Top Layer w0.2: v1(56.478,97.155) 56.745,97.155 59,94.9
  Bottom Layer w0.2: U1.40 56.1,96.777 v1(56.478,97.155)
NetU1_41: U1.41 VD6.1 | length 8.1
  Top Layer w0.3: VD6.1 v1(59.5,91.15)
  Bottom Layer w0.3: U1.41 55.6,94.35 55.95,94 56.65,94 v1(59.5,91.15)
NetVD4_1: VD4.1 X6.2 | length 2.5
  Top Layer w0.3: VD4.1 53.25,78.65 53.875,78.025 X6.2
NetVD4_3: VD4.3 X6.3 | length 2.5
  Top Layer w0.3: X6.3 54.525,78.025 55.15,78.65 VD4.3
pads on no net: RK-1. RK-1.1 RK-1.2 RK-1.3 RK-1.4 RK-2. RK-2.1 RK-2.2 RK-2.3 RK-2.4 U1.2 U1.17 U1.18 U1.19 U1.20 U1.27 U1.28 U1.29 U1.32 U1.33 U1.38 U1.42 U1.43 U1.46 X6.4

## Polygon pours and split planes (outlines as drawn)
GND on Bottom Layer "Bot GND" (solid, remove dead copper, pour order 2): 31.25,118.75 88.5,118.75 88.5,71.25 88.25,71 88,71.25 31,71.25
GND on Top Layer "Bot GND" (solid, remove dead copper, pour order 4): 31.25,118.75 88.75,118.75 88.5,118.5 88.5,71 31.25,71

## Keep-outs
Keep-Out Layer:
  lines w0.05: 32.106,104.712 32.106,106.712 cw(c34.106,106.712) 34.106,108.712 35.106,108.712 ccw(c35.106,115.712) 42.106,115.712 cw(c44.106,115.712) 44.106,117.712 63.206,117.712 ; 32.106,104.912 32.106,78.712 ccw(c34.106,78.712) 34.106,76.712 43.106,76.712 cw(c43.106,69.712) 49.15,73.244 ; 49.098,73.255 ccw(c50.34,73.474) 50.356,72.212 ; 50.34,72.212 75.606,72.212 77.872,72.212 ; 62.356,117.712 68.106,117.712 cw(c68.106,115.712) 70.106,115.712 ccw(c77.106,115.712) 77.106,108.712 86.106,108.712 cw(c86.106,106.712) 88.106,106.712 88.106,80.312 ; 77.857,72.213 ccw(c77.872,73.474) 79.11,73.233 ; 79.062,73.244 cw(c85.106,69.712) 85.106,76.712 86.106,76.712 ccw(c86.106,78.712) 88.106,78.712 88.106,80.437